# Altium PCB board.PcbDoc
Units mm, origin at the board's own origin, x right, y up, seen from the top; angles counter-clockwise.
Board outline 40 x 17 mm, 2 copper layers (Top Layer, Bottom Layer), stack 0.97 mm thick; 25 components, 24 nets, 116 pads, 26 vias.
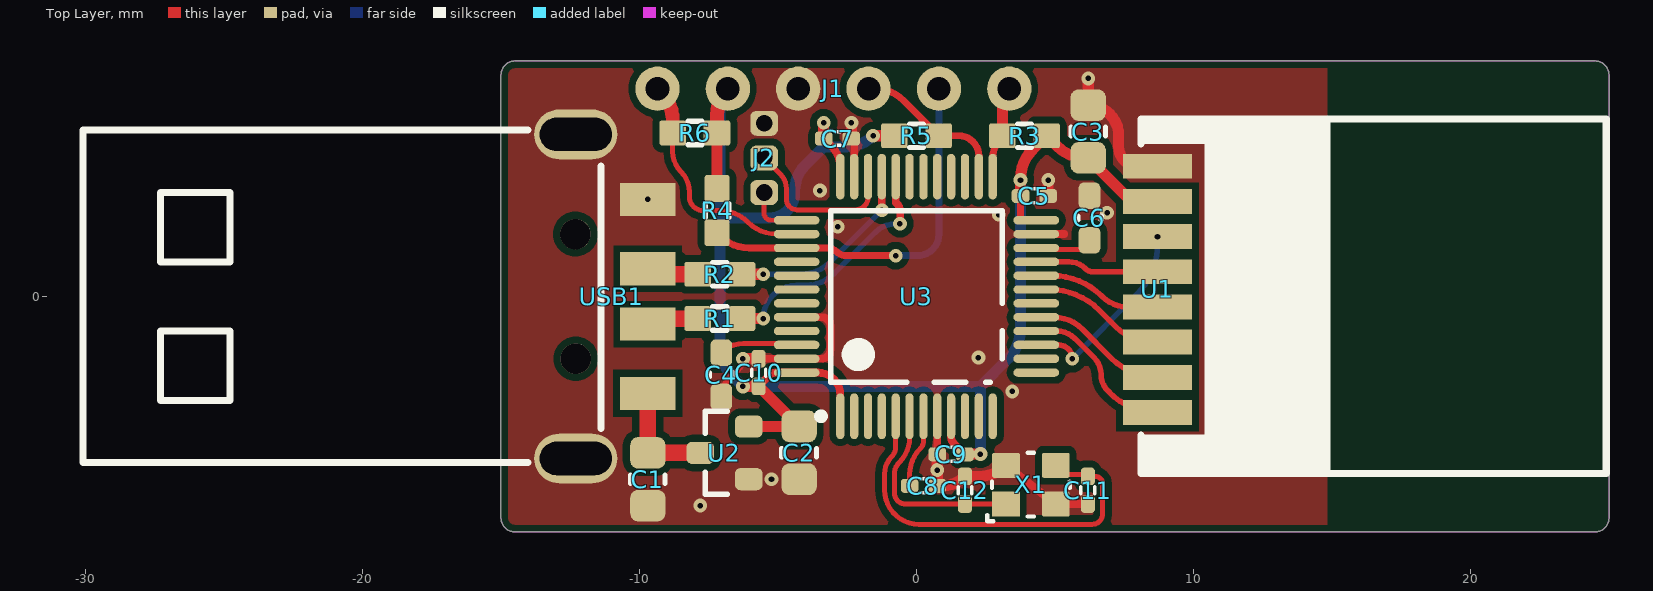
[diagram p0: Top Layer view]
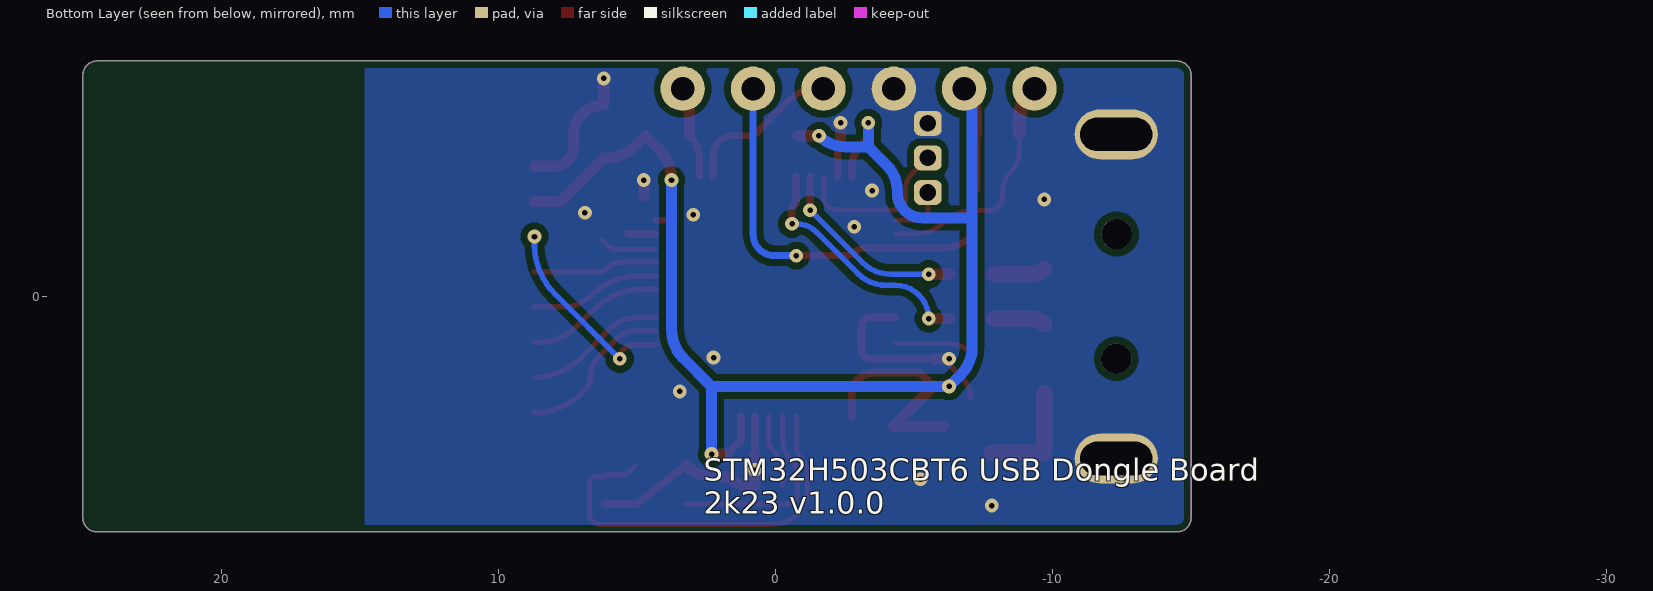
[diagram p1: Bottom Layer view, seen from below]
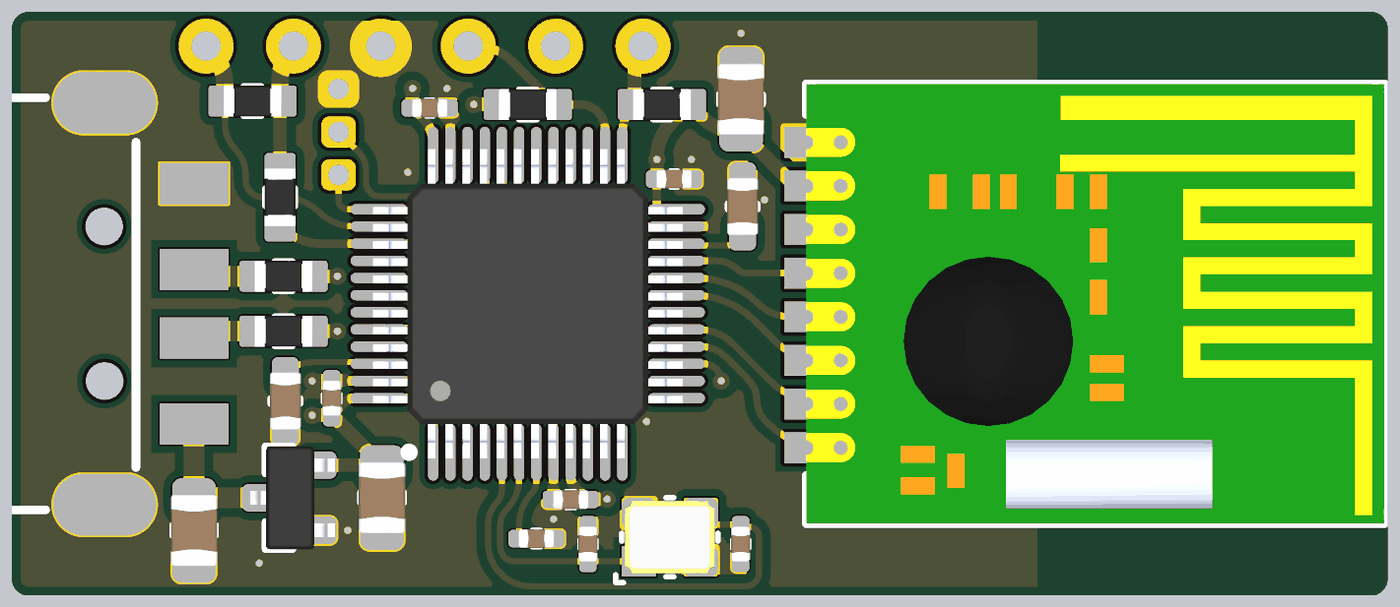
[diagram p2: 3D render of the assembled board from above, using the file's embedded part models]

## Layer stack, top to bottom
Top Solder: solder mask 0.0127, Solder Resist, Dk 3.8
Top Layer: signal copper 0.035
Dielectric: core 0.9, FR-4, Dk 4.5
Bottom Layer: signal copper 0.035
Bottom Solder: solder mask 0.0127, Solder Resist, Dk 3.8

## Board outline
-15,-8 -15,8 cw(c-14.5,8) -14.5,8.5 24.5,8.5 cw(c24.5,8) 25,8 25,-8 25.001,-8.001 cw(c24.501,-8.001) 24.501,-8.501 24.5,-8.5 -14.5,-8.5 cw(c-14.5,-8)

## Design rules (kind name [scope] priority, off if disabled: settings)
AcuteAngle [All] p1: minimum=6.00000000000000E+0001 checktracksonly=FALSE
Clearance [All] p1: gap=0.25 ignorepadtopadclearanceinfootprint=FALSE except(0.13: Arc-Arc Arc-Track Arc-SMDPad Arc-Via Track-Track Track-SMDPad Track-Via SMDPad-SMDPad SMDPad-Via THPad-Via Via-Via; 0.15: Arc-THPad Arc-Text Arc-Hole Track-THPad Track-Text Track-Hole SMDPad-THPad SMDPad-Text SMDPad-Hole THPad-THPad THPad-Text THPad-Hole Via-Text Via-Hole Fill-Text Fill-Hole Poly-Text Poly-Hole Region-Text Region-Hole Text-Text Text-Hole)
ComponentClearance ComponentClearance_1 [HasFootprint('HDR-1X6_2.54') or HasFootprint('HDR-1x3-P1.25')] p1: gap=-1 collisioncheckmode=3 verticalgap=2540 showdistances=FALSE
ComponentClearance ComponentClearance_2 [HasFootprint('TP2030_SMD')] p2: gap=-1 collisioncheckmode=3 verticalgap=2540 showdistances=FALSE
ComponentClearance [All] p3: gap=0.3 collisioncheckmode=3 verticalgap=0.254 showdistances=FALSE
HoleSize [All] p1: absolutevalues=TRUE maxlimit=6 minlimit=0.2 maxpercent=80.000 minpercent=20.000
HoleToHoleClearance HoleToHoleClearance_1 [IsVia vs IsThruPin] p1: gap=0.7 allowstackedmicrovias=TRUE
HoleToHoleClearance [All] p2: gap=0.5 allowstackedmicrovias=TRUE
MinimumSolderMaskSliver [All] p1 off: minsoldermaskwidth=0.254
PlaneClearance [All] p1: clearance=0.45
PlaneConnect [All] p1: planeconnectstyle=Direct reliefexpansion=0.3 reliefentries=4 reliefconductorwidth=0.381 reliefairgap=0.178
PolygonConnect [All] p1: connectstyle=Direct reliefconductorwidth=0.381 reliefentries=4 polygonreliefangle="90 Angle" airgapwidth=0.356
RoutingVias [All] p1: holewidth=0.3 width=0.6 viastyle="Through Hole" minholewidth=0.2 minwidth=0.45 maxholewidth=0.9 maxwidth=1.27
SilkToSilkClearance [All] p1 off: silktosilkclearance=0.254
SilkToSolderMaskClearance [IsPad] p1 off: minsilkscreentomaskgap=0.254 clearancetoexposedcopper=TRUE
SolderMaskExpansion [All] p1: expansion=0.102 istentingtop=FALSE
UnRoutedNet [All] p1: checkbadconnections=TRUE
Width [All] p1: maxlimit=3.81 minlimit=0.14 preferedwidth=0.254
21 further rules are at their usual default settings.

## Components (designator, comment, footprint, x,y, rotation, side; value= is the part's Value field where it differs from the comment)
C1 "10uF" C0805 -9.7,-6.6 r90 top
C2 "10uF" C0805 -4.235,-5.648 r90 top
C3 "10uF" C0805 6.2,5.953 r270 top
C4 "2.2u" C0603 -7.046,-2.831 r90 top
C5 "100nF" C0402 4.254,3.631 r180 top
C6 "2.2u" C0603 6.246,2.831 r270 top
C7 "100nF" C0402 -2.85,5.7 r180 top
C8 "100nF" C0402 0.25,-6.836 r180 top
C9 "100nF" C0402 1.25,-5.7 r0 top
C10 "100nF" C0402 -5.7,-2.75 r270 top
C11 "18pF" C0402 6.188,-6.996 r90 top
C12 "18pF" C0402 1.75,-6.996 r270 top
J1 "TOUCH" HDR-1X6_2.54 -3,7.5 r270 top
J2 "SWD" HDR-1x3-P1.25 -5.5,5 r90 top
R1 "22" R0603 -7.1,-0.8 r0 top
R2 "22" R0603 -7.1,0.8 r0 top
R3 "2k" R0603 3.9,5.8 r0 top
R4 "2k" R0603 -7.2,3.1 r90 top
R5 "2k" R0603 0,5.8 r180 top
R6 "2k" R0603 -8,5.9 r0 top
U1 "RFM75" RFM75 16.5,0 r270 top
U2 "XC6206P332MR" SOT-23 -6.931,-5.648 r0 top
U3 "STM32H503CBT6" LQFP-48 0,0 r90 top
USB1 "48037-2100" USB-A-TH_480372100 -11,0 r270 top
X1 "12MHZ" CRYSTAL_2.5x2.0mm 4.13,-6.796 r0 top

## Footprints (in the part's own frame and the unit in brackets; to place one, negate y for a bottom-side part, rotate by r counter-clockwise, add the part's x,y. Pads: shape width x height; smd on the part's side, far side on the other; paste and mask are expansions set on the pad)
C0402 [mm] "Chip Capacitor Body"
  rrect50% 0.635x0.508 smd mask+0.05: 1(-0.5,0) 2(0.5,0)
  silkscreen extent -0.1,-0.25 0.1,0.25, body extent -0.52,-0.27 0.53,0.28, height 0.55
C0603 [mil] "Chip Capacitor"
  rrect50% 38x31 smd mask+1.97: 1(-31.5,0) 2(31.5,0)
  silkscreen extent -3,-17 3,17, body extent -33,-18 33,18, height 35
C0805 [mil] "Chip Capacitor"
  rrect50% 45x50 smd mask+1.97: 1(-37.5,0) 2(37.5,0)
  silkscreen extent -6,-25 6,25, body extent -41,-27 41,27, height 53
CRYSTAL_2.5x2.0mm [mm]
  rect 1x0.9 smd paste+0 mask+0.051: 1(-0.9,-0.7)
  rrect15% 1x0.9 smd paste-2539.97 mask+0.051: 2(0.9,-0.7) 3(0.9,0.7) 4(-0.9,0.7)
  silkscreen extent -1.57,-1.32 1.4,1.15, body extent -1.3,-1.05 1.3,1.05, height 0.55
HDR-1x3-P1.25 [mm]
  rrect50% 0.9x1 hole 0.6: 1(-1.25,0) 2(0,0) 3(1.25,0)
HDR-1X6_2.54 [mm]
  round 1.6 hole 0.85: 1(0,6.35) 2(0,3.81) 3(0,1.27) 4(0,-1.27) 5(0,-3.81) 6(0,-6.35)
LQFP-48 [mm]
  oval 1.65x0.3 smd: 1(-4.325,2.75) 2(-4.325,2.25) 3(-4.325,1.75) 4(-4.325,1.25) 5(-4.325,0.75) 6(-4.325,0.25) 7(-4.325,-0.25) 8(-4.325,-0.75) 9(-4.325,-1.25) 10(-4.325,-1.75) 11(-4.325,-2.25) 12(-4.325,-2.75) 25(4.325,-2.75) 26(4.325,-2.25) 27(4.325,-1.75) 28(4.325,-1.25) 29(4.325,-0.75) 30(4.325,-0.25) 31(4.325,0.25) 32(4.325,0.75) 33(4.325,1.25) 34(4.325,1.75) 35(4.325,2.25) 36(4.325,2.75)
  oval 0.3x1.65 smd: 13(-2.75,-4.325) 14(-2.25,-4.325) 15(-1.75,-4.325) 16(-1.25,-4.325) 17(-0.75,-4.325) 18(-0.25,-4.325) 19(0.25,-4.325) 20(0.75,-4.325) 21(1.25,-4.325) 22(1.75,-4.325) 23(2.25,-4.325) 24(2.75,-4.325) 37(2.75,4.325) 38(2.25,4.325) 39(1.75,4.325) 40(1.25,4.325) 41(0.75,4.325) 42(0.25,4.325) 43(-0.25,4.325) 44(-0.75,4.325) 45(-1.25,4.325) 46(-1.75,4.325) 47(-2.25,4.325) 48(-2.75,4.325)
  silkscreen extent -4.45,-3.1 3.1,3.57, body extent -4.5,-4.5 4.5,4.5, height 1.5
R0603 [mil] "Chip Resistor; Body 1.6 x 0.8 mm (LxW typ)"
  rrect20% 38x35.43 smd mask+1.97: 1(-31.5,0) 2(31.5,0)
  silkscreen extent -10,-17 10,17, body extent -33,-18 33,18, height 22
RFM75 [mm]
  rect 0.9x2.5 smd: 1(-4.7,-7.8) 2(-3.43,-7.8) 3(-2.16,-7.8) 4(-0.89,-7.8) 5(0.38,-7.8) 6(1.65,-7.8) 7(2.92,-7.8) 8(4.19,-7.8)
  silkscreen extent -6.4,-8.4 6.4,8.4, body extent -6.4,-8.4 6.4,8.4, height 3.01
SOT-23 [mm]
  rrect50% 1x0.8 smd mask+0.05: 1(0.875,-0.95) 2(0.875,0.95) 3(-0.875,0)
  silkscreen extent -0.7,-1.5 0.1,1.5, body extent -1.27,-1.5 1.33,1.5, height 1.1
USB-A-TH_480372100 [mm]
  rect 1.2x2 smd paste-100 mask+0.051: 1(3.5,1.3) 2(1,1.3) 3(-1,1.3) 4(-3.5,1.3)
  oval 1.8x3 hole 1.2 slot 2.6 at 90 deg paste-2539.97 mask+0.051: 5(-5.85,-1.3) 6(5.85,-1.3)
  round 1.1 hole 1.1 unplated paste-2539.97: ""(-2.25,-1.313) ""(2.25,-1.3)
  silkscreen extent -6,-19.09 6,-0.39, body extent -6,-19.09 6,-0.4, height 3.1

## Part data
C1 C2 C3 C5 C7 C8 C9 C10: library part CAP
C4 C6: library part Cap
C11 C12: library part CAP, "18pF 50V 0402", LCSC part number=C33149, P/N=GRM1555C1H180JA01D
J1 J2: library part "Header 3"
R1 R2 R3 R4 R5 R6: library part RES
U2: library part Component_4_1
USB1: LCSC part number=C136453, P/N=48037-2100
X1: library part "CRYSTAL 12MHZ 3.20mm x 2.50mm", "CRYSTAL 12MHZ 10PF SMD", LCSC part number=C284155, P/N=TXM12M0004252FBCEO00T

## Via types
v1: diameter 0.5, hole 0.2, Top Layer to Bottom Layer, tented both sides, 26 vias

## Nets (pads, with @x,y where several pads share a name; then routed paths per layer and width w, separated by ;. In a path a pad name is that pad's centre, name@x,y a point inside that pad or via, vN(x,y) a via of type N, cw(c..) or ccw(c..) an arc to the next point about the centre after c; other vN are vias at no path point)
3V3: C2.2 C3.2 C5.2 C7.2 C9.2 C10.2 J1.5 R3.2 R4.2 R5.2 R6.2 U1.2 U2.2 U3.1 U3.9 U3.24 U3.36 U3.48 | length 64.6
  Top Layer w0.25: C5.2 3.754,2.75 U3.24
  Top Layer w0.28: C10.2 -5.7,-3.24 -5.305,-2.845 cw(c-5.075,-3.075) -5.075,-2.75 U3.48 -3.551,-2.75 cw(c-3.551,-3.551) -2.75,-3.551 U3.1 ; C7.2 -3.05,5.4 cw(c-3.774,4.675) -2.75,4.675 U3.36 ; U3.9 1.25,-5.075 ccw(c1.575,-5.075) 1.345,-5.305 1.74,-5.7 C9.2
  Top Layer w0.4: R4.2 R6.2 ; v1(-6.268,-3.25) C10.2 ; U2.2 -4.238,-4.697 -5.695,-3.24 C10.2@-5.7,-3.24 ; C7.2 v1(-3.35,6.268) ; v1(-1.568,5.8) R5.2 ; C9.2@1.74,-5.689 v1(2.308,-5.689) ; C5.2 v1(3.754,4.199) 3.754,4.255 cw(c5.202,4.255) 4.178,5.278 R3.2 5.076,5.424 ccw(c6.1,6.448) 6.1,5 C3.2 7.77,3.43 U1.2
  Top Layer w0.5: R6.2 -7.2,6.559 cw(c-5.869,6.559) J1.5
  Bottom Layer w0.4: J1.5 ccw(c-6.11,6.8) -7.1,6.8 -7.1,2.833 ; v1(-3.35,6.268) -3.35,5.4 ; v1(-1.568,5.8) cw(c-2.534,6.766) -2.534,5.4 -3.35,5.4 ; v1(2.308,-5.689) 2.308,-3.25 ; v1(3.754,4.199) 3.754,-1.204 cw(c2.307,-1.204) 3.33,-2.228 2.308,-3.25 ; -7.1,2.833 -5.3,2.833 ccw(c-5.3,3.733) -4.4,3.733 -4.4,3.8 cw(c-3.072,3.8) -4.011,4.739 -3.35,5.4 ; -7.1,2.833 -7.1,-1.818 ccw(c-5.652,-1.818) -6.676,-2.842 v1(-6.268,-3.25) 2.308,-3.25
5V: C1.2 U2.3 USB1.1 | length 4
  Top Layer w0.6: USB1.1 C1.2 U2.3
CE: U1.3 U3.15 | length 7.2
  Top Layer w0.2: U3.15 5.125,-1.75 cw(c5.125,-2.25) v1(5.625,-2.25)
  Bottom Layer w0.2: v1(5.625,-2.25) 7.956,0.081 ccw(c6.16,1.877) 8.7,1.877 v1(8.7,2.16)
CSN: U1.4 U3.21 | length 4.5
  Top Layer w0.2: U3.21 5.496,1.25 cw(c5.496,0.396) 6.1,1 ccw(c6.366,1.266) 6.366,0.89 U1.4
DM: R1.2 U3.32 | length 8.8
  Top Layer w0.28: U3.32 -0.75,3.395 -0.718,3.363 cw(c-1.049,3.032) -0.586,3.1 -0.586,2.625 v1(-0.598,2.625)
  Top Layer w0.4: R1.2 v1(-5.532,-0.8)
  Bottom Layer w0.2: v1(-5.532,-0.8) cw(c-4.332,-0.8) -4.332,0.4 -4,0.4 ccw(c-4,1.848) -2.976,0.824 -1.476,2.324 cw(c-0.75,1.599) v1@-0.75,2.625
DP: R2.2 U3.33 | length 7.2
  Top Layer w0.28: v1(-1.25,3.112) U3.33
  Top Layer w0.4: R2.2 v1(-5.532,0.8)
  Bottom Layer w0.2: v1(-5.532,0.8) -4.162,0.8 ccw(c-4.162,2.248) -3.138,1.224 v1(-1.25,3.112)
GND: C1.1 C2.1 C3.1 C4.1 C5.1 C6.1 C7.1 C8.1 C9.1 C10.1 C11.1 C12.1 J1.4 J2.3 U1.1 U2.1 U3.8 U3.23 U3.35 U3.44 U3.47 USB1.4 USB1.5 USB1.6 X1.2 X1.4 | length 24.3
  Top Layer w0.2: C4.1 cw(c-6.14,-3.631) -6.78,-2.991 -6.429,-2.64 ccw(c-6.819,-2.25) v1(-6.268,-2.25)
  Top Layer w0.28: C10.1 U3.47 -3.431,-2.25 ccw(c-3.431,-1.928) -3.109,-1.928 -3.109,-1.064 ccw(c-3.423,-1.064) -3.423,-0.75 U3.44 ; C7.1 cw(c-2.591,5.458) -2.25,5.458 U3.35 ; C9.1 U3.8 ; U3.23 5.334,2.25
  Top Layer w0.3: X1.4 X1.2 C11.1
  Top Layer w0.4: v1(-6.268,-2.25) C10.1 ; C7.1 v1(-2.35,6.268) ; C9.1 v1(0.75,-6.268) C8.1 0.93,-6.836 ccw(c0.93,-5.677) C12.1 2.265,-6.496 ccw(c2.265,-5.131) X1.4 ; C5.1 v1(4.754,4.199) ; v1(6.2,7.873) C3.1 cw(c6.2,5.805) 7.3,5.805 7.3,5.4 ccw(c8,5.4) 8,4.7 U1.1
  other v1: -7.806,-7.552 -5.233,-6.598 3.454,-3.429 2.235,-2.21 -2.845,2.515 2.972,2.946 6.883,3.023 -9.7,3.5 -3.488,3.823
IRQ: U1.8 U3.16 | length 6.2
  Top Layer w0.2: U3.16 5.064,-1.25 cw(c5.064,-2.183) 5.723,-1.523 6.409,-2.209 cw(c5.798,-2.819) 6.662,-2.819 ccw(c7.488,-2.819) 6.904,-3.404 6.976,-3.476 ccw(c8.7,-1.752) U1.8 U1.8@8.31,-4.19
M\C\L\R\: J1.1 R3.1 U3.25 | length 3.3
  Top Layer w0.25: U3.25 2.75,4.955 cw(c3.945,4.955) R3.1
  Top Layer w0.4: R3.1 3.1,6.896 cw(c3.954,6.896) J1.1
MISO: U1.7 U3.17 | length 5.1
  Top Layer w0.2: U3.17 4.962,-0.75 cw(c4.962,-2.169) 5.966,-1.166 7.027,-2.227 ccw(c8.7,-0.554) U1.7
MOSI: U1.6 U3.19 | length 5
  Top Layer w0.2: U3.19 4.798,0.25 cw(c4.798,-2.29) 6.594,-0.494 7.2,-1.1 ccw(c8.528,0.228) 8.528,-1.65 U1.6
NetC4_2: C4.2 U3.46 | length 2.8
  Top Layer w0.18: C4.2 cw(c-6.245,-2.832) -6.245,-1.699 U3.46@-4.325,-1.699
NetC6_2: C6.2 U3.22 | length 2.1
  Top Layer w0.18: U3.22@4.325,1.699 5.914,1.699 C6.2
NetC8_2: C8.2 U3.7 | length 2.6
  Top Layer w0.18: C8.2 -0.25,-6.432 cw(c1.09,-6.432) 0.143,-5.484 ccw(c-0.117,-5.225) 0.25,-5.225 U3.7
NetC11_2: C11.2 U3.5 X1.3 | length 14.7
  Top Layer w0.18: U3.5 -0.75,-5.429 cw(c-1.258,-5.429) -0.899,-5.789 ccw(c-0.286,-6.402) -1.153,-6.402 -1.153,-6.982 ccw(c0.092,-6.982) 0.092,-8.227 6.34,-8.227 ccw(c6.34,-7.846) 6.721,-7.846 6.721,-6.763 ccw(c6.455,-6.763) 6.455,-6.496 C11.2 6.122,-6.431 5.365,-6.431 X1.3
NetC12_2: C12.2 U3.6 X1.1 | length 7.2
  Top Layer w0.18: U3.6 -0.25,-5.1 cw(c-1.511,-5.1) -0.619,-5.992 ccw(c-0.19,-6.421) -0.797,-6.421 -0.797,-7.09 ccw(c-0.391,-7.09) -0.391,-7.496 C12.2 X1.1
NetR1_1: R1.1 USB1.2 | length 1.9
  Top Layer w0.6: USB1.2 cw(c-9.218,-1.482) -9.218,-0.8 R1.1
NetR2_1: R2.1 USB1.3 | length 1.9
  Top Layer w0.6: USB1.3 ccw(c-9.218,1.482) -9.218,0.8 R2.1
SCK: U1.5 U3.20 | length 4.7
  Top Layer w0.2: U3.20 4.898,0.75 cw(c4.898,-1.79) 6.694,0.006 ccw(c7.626,0.938) 7.626,-0.38 U1.5
SCL: J1.2 R4.1 U3.39 | length 13.9
  Top Layer w0.25: R4.1 -7.074,2.174 ccw(c-6.05,3.198) -6.05,1.75 U3.39 -3.203,1.75 cw(c-3.203,1.32) -2.899,1.624 ccw(c-2.528,1.994) -2.528,1.471 v1(-0.75,1.471)
  Bottom Layer w0.25: v1(-0.75,1.471) 0.03,1.471 ccw(c0.03,2.251) 0.81,2.251 J1.2
SDA: J1.3 R5.1 U3.26 | length 5.8
  Top Layer w0.25: J1.3 -1.5,7.5 cw(c-1.5,6.052) -0.476,7.076 R5.1 1.525,5.8 cw(c1.525,5.075) 2.25,5.075 U3.26
SWCLK: J2.1 U3.37 | length 2.1
  Top Layer w0.18: J2.1 -5.5,3 ccw(c-5.25,3) -5.25,2.75 U3.37
SWDIO: J2.2 U3.34 | length 6
  Top Layer w0.18: J2.2 -4.912,4.412 cw(c-5.424,3.9) -4.7,3.9 -4.7,3.514 ccw(c-4.314,3.514) -4.314,3.128 -2.2,3.128 ccw(c-2.2,3.578) -1.75,3.578 U3.34
T\S\: J1.6 R6.1 U3.38 | length 8.6
  Top Layer w0.18: R6.1 -8.8,5.224 ccw(c-7.776,5.224) -8.501,4.501 ; -8.5,4.5 cw(c-9.224,3.776) -8.2,3.776 -8.2,3.6 ccw(c-7.7,3.6) -7.7,3.1 -7.1,3.1 cw(c-7.1,1.652) -6.076,2.676 -6.074,2.674 ccw(c-5.05,3.698) -5.05,2.25 U3.38
  Top Layer w0.5: J1.6 -9.224,7.374 cw(c-10.248,6.35) -8.8,6.35 R6.1
pads on no net: U3.2 U3.3 U3.4 U3.10 U3.11 U3.12 U3.13 U3.14 U3.18 U3.27 U3.28 U3.29 U3.30 U3.31 U3.40 U3.41 U3.42 U3.43 U3.45 USB1.

## Polygon pours and split planes (outlines as drawn)
GND on Top Layer "NONET_L02_P-001" (solid, remove dead copper, pour order 0): -15,8.5 -15,-8.5 25,-8.5 25,8.5
GND on Bottom Layer "NONET_L02_P-001" (solid, remove dead copper, pour order 1): -15,8.5 -15,-8.5 25,-8.5 25,8.5

## Keep-outs
Keep-Out Layer:
  lines w0: -15,-8 ccw(c-14.5,-8) -14.5,-8.5 ; -15,8 cw(c-14.5,8) -14.5,8.5 ; 24.501,-8.501 ccw(c24.501,-8.001) 25.001,-8.001 ; 24.5,8.5 cw(c24.5,8) 25,8
  lines w0.001: -15,-8 -15,8 ; -14.5,-8.5 24.5,-8.5 ; -14.5,8.5 24.5,8.5 ; 25,-8 25,8

## Other copper
Multi-Layer:
  pour cut-out: 14.82,-8.5 25,-8.5 25,8.5 14.82,8.5

## Silkscreen, mask and mechanical layers (free items; w line width, h text height)
Bottom Overlay:
  text "STM32H503CBT6 USB Dongle Board / 2k23 v1.0.0" at 2.591,-7.849 h0.8